# Altium PCB quads.PcbDoc (part 1 of 2)
Units mil, origin at the board's own origin, x right, y up, seen from the top; angles counter-clockwise.
Board outline 3936.87 x 3936.87 mil, 2 copper layers (Top Layer, Bottom Layer); 52 components, 53 nets, 184 pads, 27 vias.
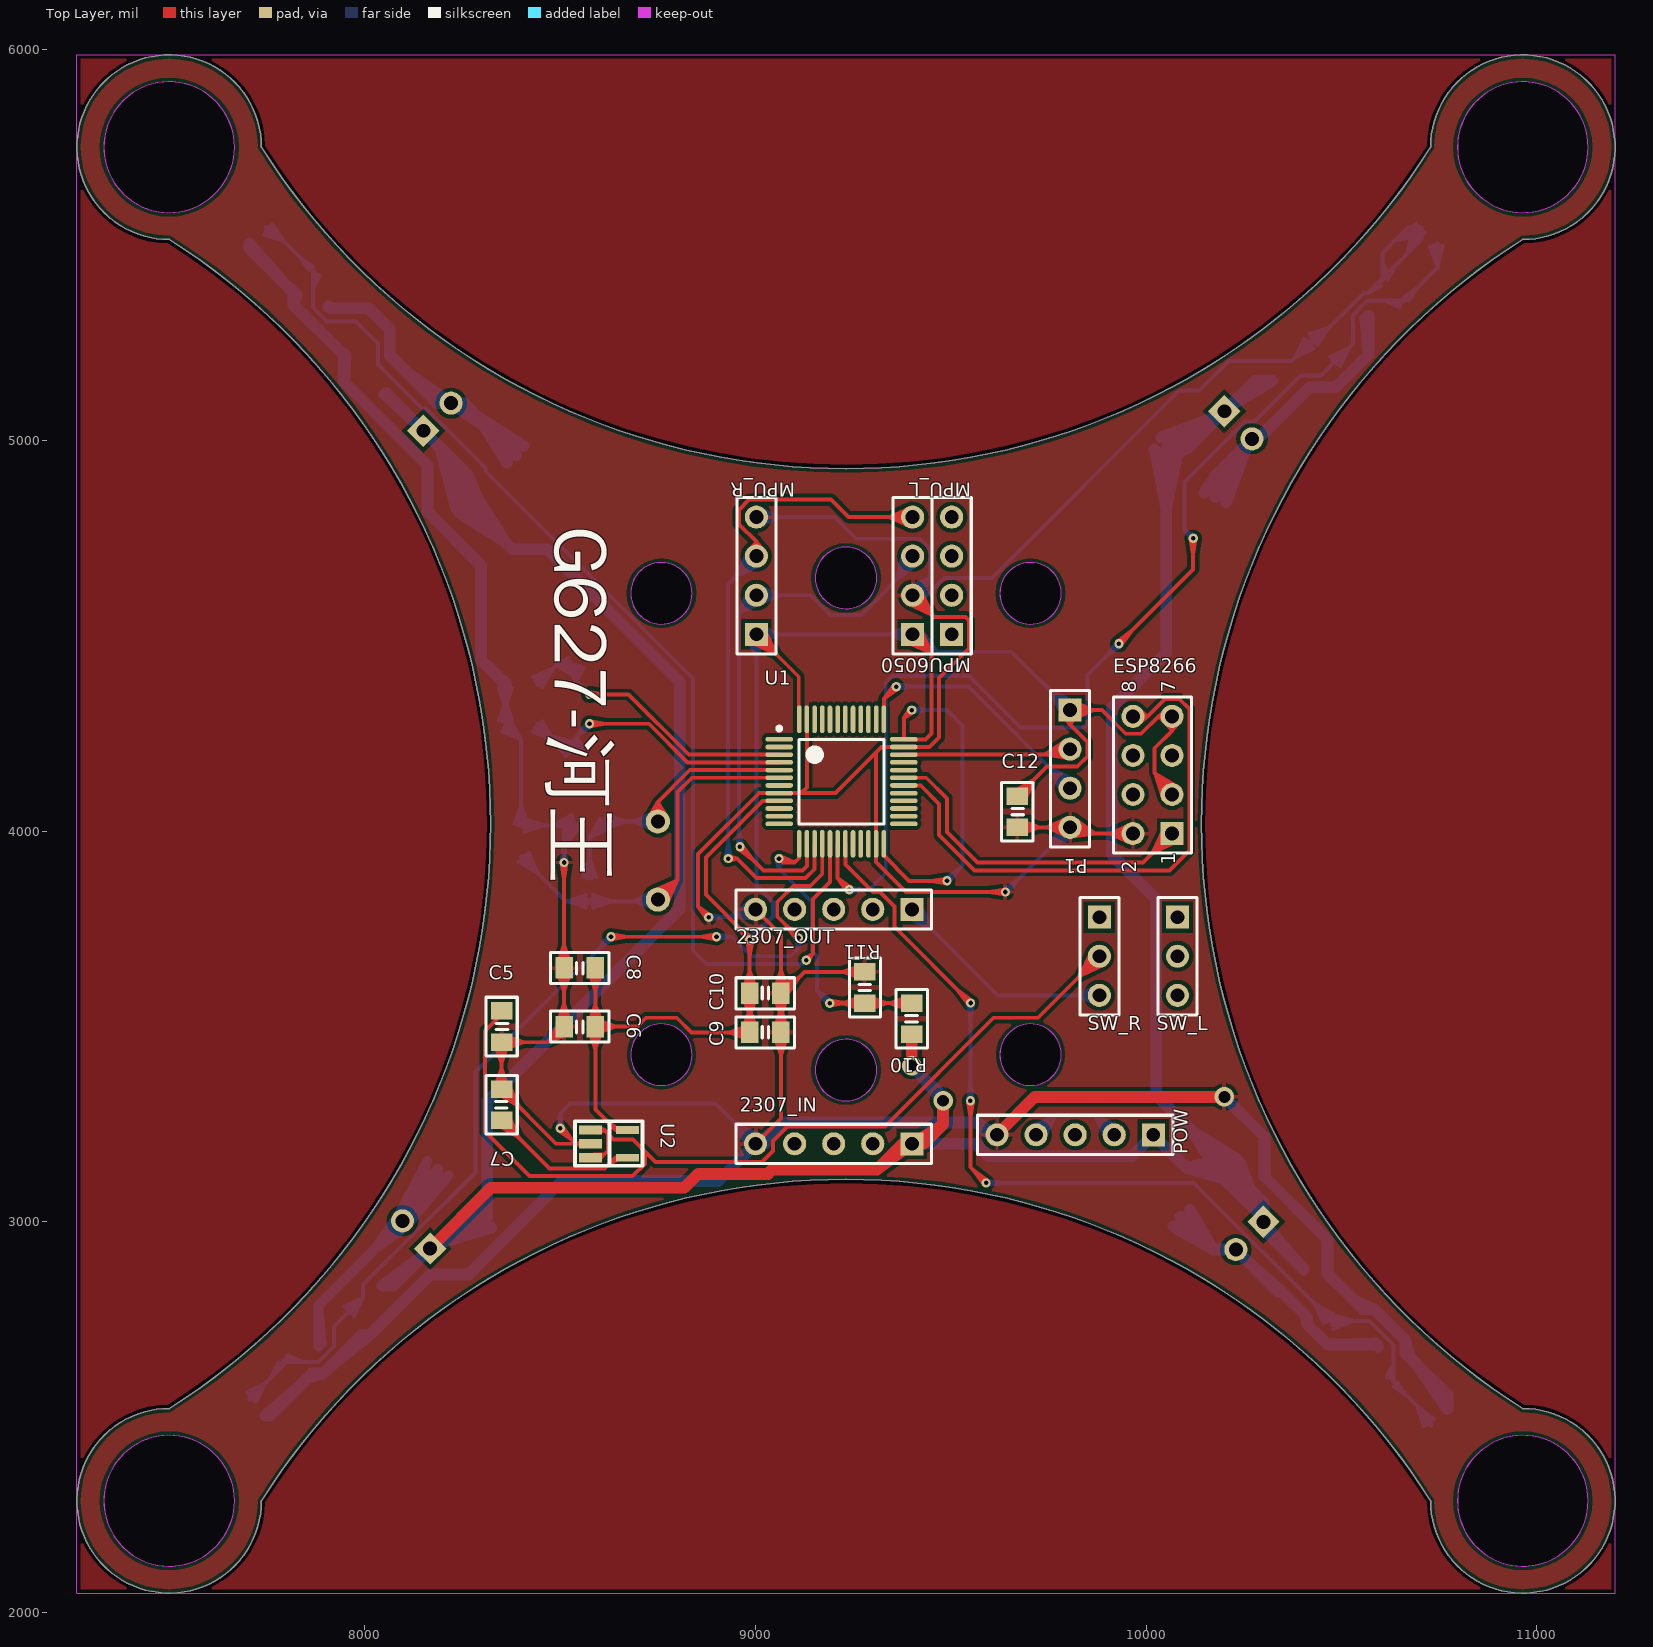
[diagram p0: Top Layer view]
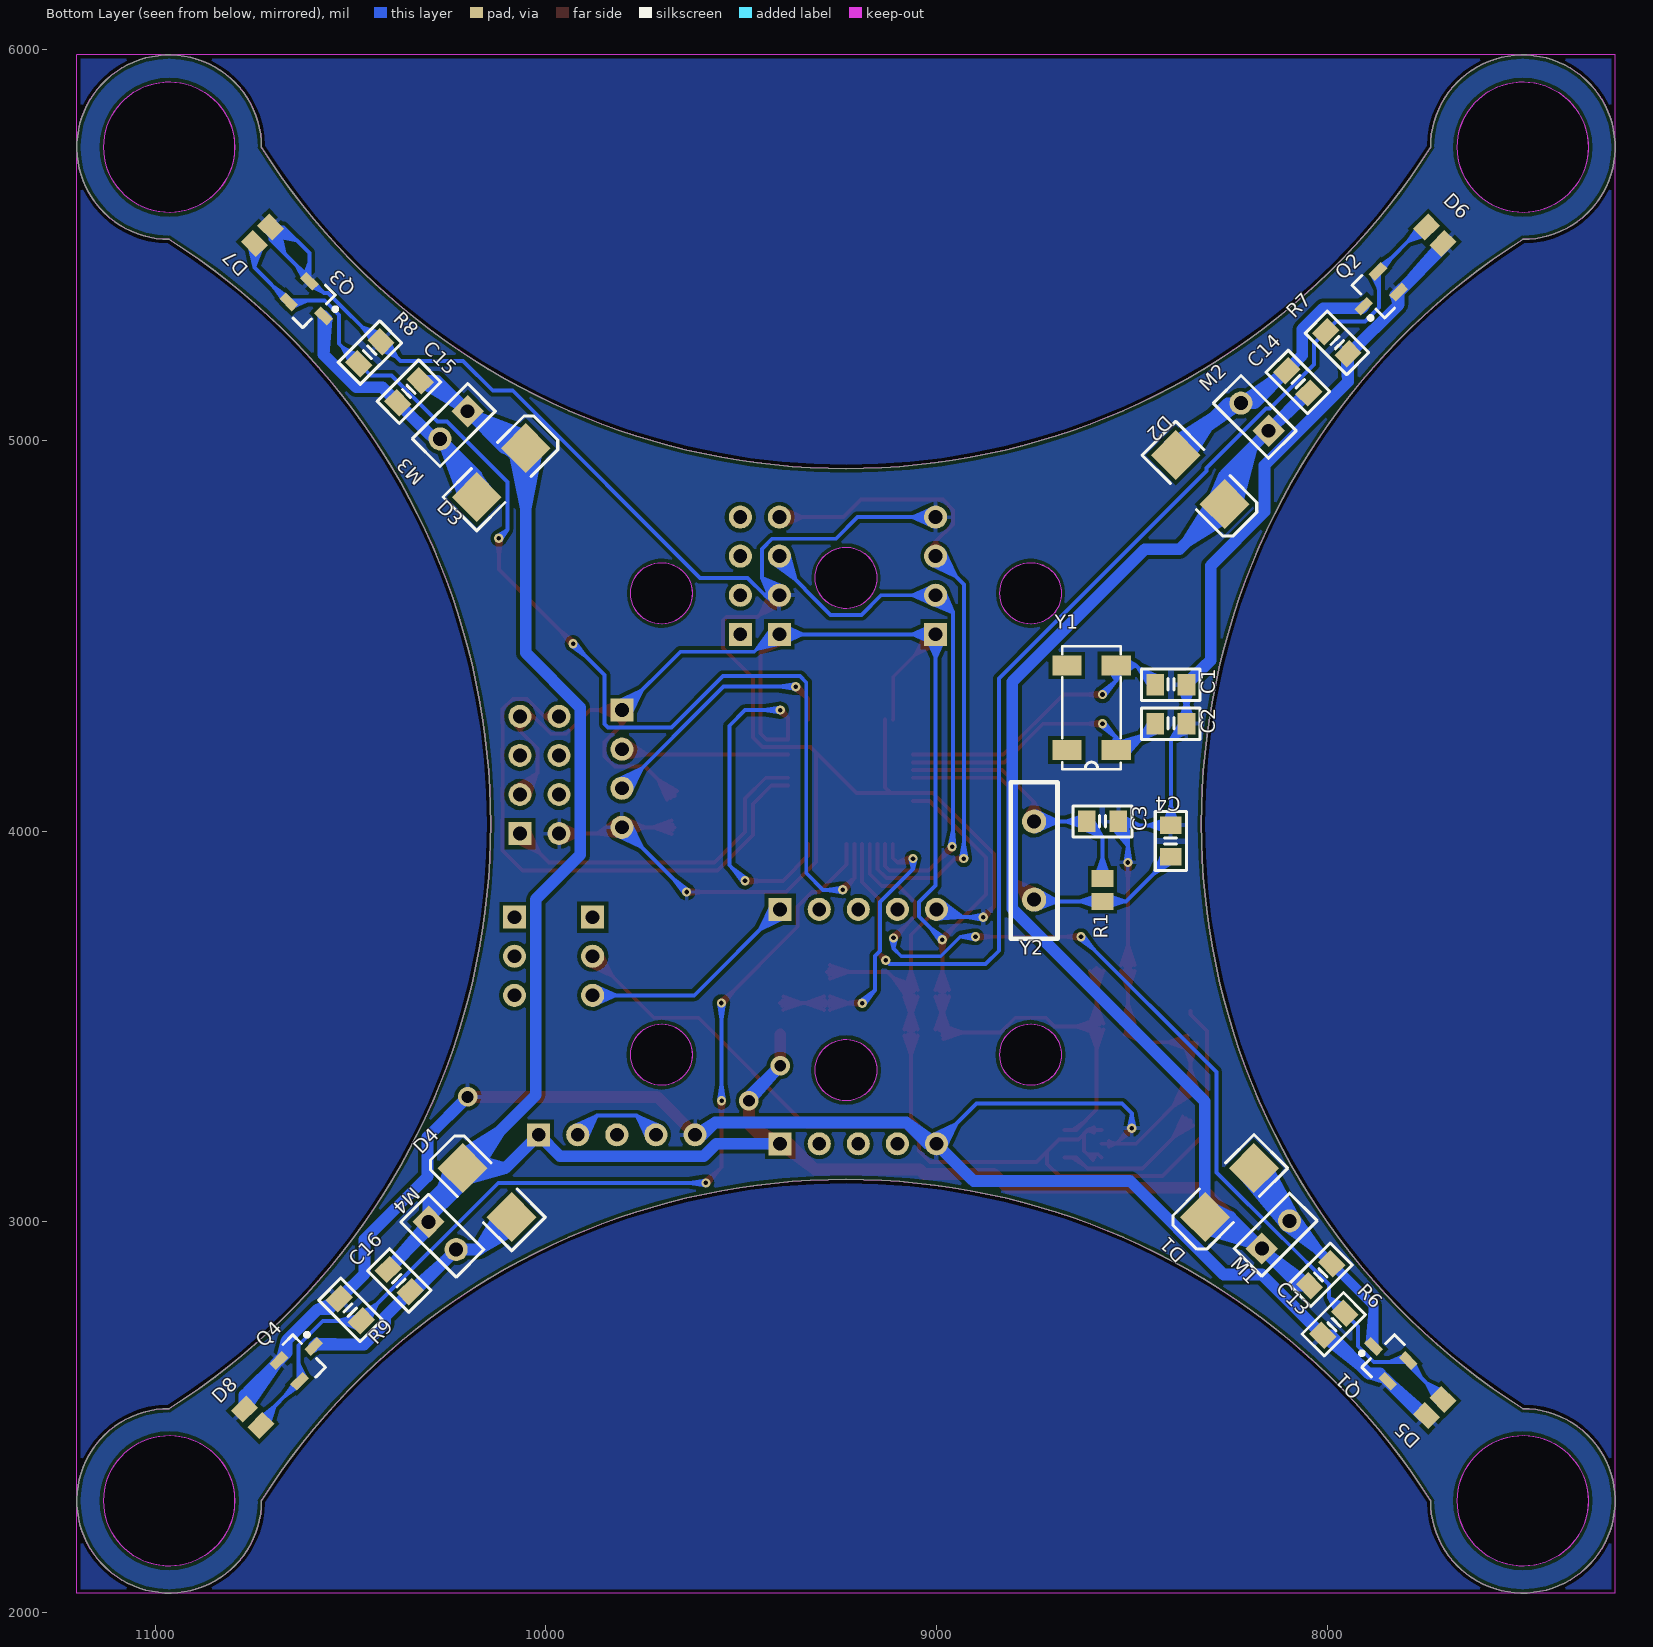
[diagram p1: Bottom Layer view, seen from below]

## Layer stack, top to bottom
Top Layer: signal copper 1.4
Dielectric: dielectric 12.6, FR-4, Dk 4.8
Bottom Layer: signal copper 1.4

## Board outline
10727.56,2286.22 ccw(c10963.78,2286.22) 10963.78,2522.44 cw(c11912.75,4018.5) 10963.78,5514.56 ccw(c10963.78,5750.78) 10727.56,5750.78 cw(c9231.5,6699.75) 7735.44,5750.78 ccw(c7499.22,5750.78) 7499.22,5514.56 cw(c6550.25,4018.5) 7499.22,2522.44 ccw(c7499.22,2286.22) 7735.44,2286.22 cw(c9231.5,1337.25)
cut-out: 10963.78,2118.9 ccw(c10963.78,2286.22) 11131.1,2286.22 ccw(c10963.78,2286.22) 10963.78,2453.54 ccw(c10963.78,2286.22) 10796.46,2286.22 ccw(c10963.78,2286.22)
cut-out: 10963.78,5583.46 ccw(c10963.78,5750.78) 11131.1,5750.78 ccw(c10963.78,5750.78) 10963.78,5918.1 ccw(c10963.78,5750.78) 10796.46,5750.78 ccw(c10963.78,5750.78)
cut-out: 9231.5,3309.84 ccw(c9231.5,3388.58) 9310.24,3388.58 ccw(c9231.5,3388.58) 9231.5,3467.32 ccw(c9231.5,3388.58) 9152.76,3388.58 ccw(c9231.5,3388.58)
cut-out: 9703.94,3349.21 ccw(c9703.94,3427.95) 9782.68,3427.95 ccw(c9703.94,3427.95) 9703.94,3506.69 ccw(c9703.94,3427.95) 9625.2,3427.95 ccw(c9703.94,3427.95)
cut-out: 9703.94,4530.31 ccw(c9703.94,4609.05) 9782.68,4609.05 ccw(c9703.94,4609.05) 9703.94,4687.79 ccw(c9703.94,4609.05) 9625.2,4609.05 ccw(c9703.94,4609.05)
cut-out: 9231.5,4569.68 ccw(c9231.5,4648.42) 9310.24,4648.42 ccw(c9231.5,4648.42) 9231.5,4727.16 ccw(c9231.5,4648.42) 9152.76,4648.42 ccw(c9231.5,4648.42)
cut-out: 7499.22,5583.46 ccw(c7499.22,5750.78) 7666.54,5750.78 ccw(c7499.22,5750.78) 7499.22,5918.1 ccw(c7499.22,5750.78) 7331.9,5750.78 ccw(c7499.22,5750.78)
cut-out: 8759.06,4530.31 ccw(c8759.06,4609.05) 8837.8,4609.05 ccw(c8759.06,4609.05) 8759.06,4687.79 ccw(c8759.06,4609.05) 8680.32,4609.05 ccw(c8759.06,4609.05)
cut-out: 8759.06,3349.21 ccw(c8759.06,3427.95) 8837.8,3427.95 ccw(c8759.06,3427.95) 8759.06,3506.69 ccw(c8759.06,3427.95) 8680.32,3427.95 ccw(c8759.06,3427.95)
cut-out: 7499.22,2118.9 ccw(c7499.22,2286.22) 7666.54,2286.22 ccw(c7499.22,2286.22) 7499.22,2453.54 ccw(c7499.22,2286.22) 7331.9,2286.22 ccw(c7499.22,2286.22)

## Design rules (kind name [scope] priority, off if disabled: settings)
Clearance [All] p1: gap=10
PolygonConnect [All] p1: connectstyle=Relief reliefconductorwidth=10 reliefentries=4 polygonreliefangle="90 Angle" airgapwidth=10
RoutingVias [All] p1: holewidth=11.81 width=23.62 viastyle="Through Hole" minholewidth=11.81 minwidth=23.62 maxholewidth=28 maxwidth=50
SolderMaskExpansion [All] p1: expansion=4
Width [All] p1: maxlimit=50 minlimit=10 preferedwidth=10 minimp=50.000000 maximp=50.000000 favimp=50.000000
28 further rules are at their usual default settings.

## Components (designator, comment, footprint, x,y, rotation, side; value= is the part's Value field where it differs from the comment)
2307_IN "2307_in" HDR1X5 9400,3200 r180 top
2307_OUT "2307_out" HDR1X5 9400,3800 r180 top
C1 "20pF,0805" C0805tan 8400,4375 r0 bottom
C2 "20pF,0805" C0805tan 8400,4275 r0 bottom
C3 "20pF,0805" C0805tan 8575,4025 r0 bottom
C4 "20pF,0805" C0805tan 8400,3975 r270 bottom
C5 "105,0805" C0805tan 8350,3500 r90 top
C6 "106,0805" C0805tan 8550,3500 r0 top
C7 "223,0805" C0805tan 8350,3300 r270 top
C8 "104,0805" C0805tan 8550,3650 r0 top
C9 "104,0805" C0805tan 9025,3485 r180 top
C10 "104,0805" C0805tan 9025,3585 r180 top
C12 "104,0805" C0805tan 9670,4050 r90 top
C13 "104,0805" C0805tan 8017,2865 r135 bottom
C14 "104,0805" C0805tan 8075,5150 r45 bottom
C15 "104,0805" C0805tan 10350,5125 r315 bottom
C16 "104,0805" C0805tan 10375,2850 r225 bottom
D1 "1N5824" SMB 8250,3075 r315 bottom
D2 "1N5824" SMB 8325,4900 r225 bottom
D3 "1N5824" SMB 10114,4918 r135 bottom
D4 "1N5824" SMB 10150,3075 r45 bottom
D5 "LED" C0805 7725,2525 r315 bottom
D6 "LED" C0805 7725,5525 r225 bottom
D7 "LED" C0805 10725,5525 r135 bottom
D8 "LED" C0805 10750,2500 r45 bottom
ESP8266 "ESP8266" HDR2X4 10066,3994 r90 top
M1 "motor" HDR1X2 8167,2932 r135 bottom
M2 "motor" HDR1X2 8150,5025 r45 bottom
M3 "motor" HDR1X2 10200,5075 r315 bottom
M4 "motor" HDR1X2 10300,3000 r225 bottom
MPU6050 "MPU_R" HDR1X4 9402,4504 r90 top
MPU_L "MPU_L" HDR1X4 9502,4504 r90 top
MPU_R "MPU_R" HDR1X4 9002,4504 r90 top
P1 "SWD" HDR1X4 9805,4310 r270 top
POW "Header 5" HDR1X5 10018,3223 r180 top
Q1 "AO3400" SOT23_N 7850,2650 r45 bottom
Q2 "AO3400" SOT23_N 7875,5375 r315 bottom
Q3 "AO3400" SOT23_N 10600,5350 r225 bottom
Q4 "AO3400" SOT23_N 10625,2650 r135 bottom
R1 "Res2" C0805 8575,3850 r90 bottom
R6 "100K,0805" C0805tan 7983,2738 r135 bottom
R7 "100K,0805" C0805tan 7975,5250 r45 bottom
R8 "100K,0805" C0805tan 10450,5225 r315 bottom
R9 "100K,0805" C0805tan 10500,2775 r225 bottom
R10 "56K,0805" C0805tan 9400,3520 r270 top
R11 "39K,0805" C0805tan 9280,3600 r270 top
SW_L "Header 3" HDR1X3 10080,3780 r270 top
SW_R "Header 3" HDR1X3 9880,3780 r270 top
U1 "STM32F103C8T6" 48P 9220,4127 r0 top
U2 "RT9193" SOT-23-5 8625,3200 r270 top
Y1 "32.768K" MC-306 8603,4316 r90 bottom
Y2 "8MHz" XTAL1 8750,3825 r90 bottom

## Footprints (in the part's own frame and the unit in brackets; to place one, negate y for a bottom-side part, rotate by r counter-clockwise, add the part's x,y. Pads: shape width x height; smd on the part's side, far side on the other; paste and mask are expansions set on the pad)
48P [mm]
  oval 1.8x0.3 smd: 1(-4.05,2.75) 2(-4.05,2.25) 3(-4.05,1.75) 4(-4.05,1.25) 5(-4.05,0.75) 6(-4.05,0.25) 7(-4.05,-0.25) 8(-4.05,-0.75) 9(-4.05,-1.25) 10(-4.05,-1.75) 11(-4.05,-2.25) 12(-4.05,-2.75) 25(4.05,-2.75) 26(4.05,-2.25) 27(4.05,-1.75) 28(4.05,-1.25) 29(4.05,-0.75) 30(4.05,-0.25) 31(4.05,0.25) 32(4.05,0.75) 33(4.05,1.25) 34(4.05,1.75) 35(4.05,2.25) 36(4.05,2.75)
  oval 0.3x1.8 smd: 13(-2.75,-4.05) 14(-2.25,-4.05) 15(-1.75,-4.05) 16(-1.25,-4.05) 17(-0.75,-4.05) 18(-0.25,-4.05) 19(0.25,-4.05) 20(0.75,-4.05) 21(1.25,-4.05) 22(1.75,-4.05) 23(2.25,-4.05) 24(2.75,-4.05) 37(2.75,4.05) 38(2.25,4.05) 39(1.75,4.05) 40(1.25,4.05) 41(0.75,4.05) 42(0.25,4.05) 43(-0.25,4.05) 44(-0.75,4.05) 45(-1.25,4.05) 46(-1.75,4.05) 47(-2.25,4.05) 48(-2.75,4.05)
  silkscreen extent -4.17,-2.75 2.75,3.57, body extent -3.5,-3.5 3.5,3.5, height 1.6
C0805 [mm] "Chip Capacitor, Body 2.0x1.3mm, IPC High Density"
  rect 1.1x1.4 smd: 1(-0.75,0) 2(0.75,0)
  body extent -1.1,-0.72 1.1,0.72, height 1.4
C0805tan [mil]
  rect 45x55 smd: 1(-40,0) 2(40,0)
  silkscreen extent -75,-40 75,40
HDR1X2 [mm] "Connector; Header; 2 Position"
  rect 1.5x1.5 hole 0.9: 1(0,0)
  round 1.5 hole 0.9: 2(2.54,0)
  silkscreen extent -1.27,-1.27 3.81,1.27
HDR1X3 [mm] "Connector; Header; 3 Position"
  rect 1.5x1.5 hole 0.9: 1(0,0)
  round 1.5 hole 0.9: 2(2.54,0) 3(5.08,0)
  silkscreen extent -1.27,-1.27 6.35,1.27
HDR1X4 [mm]
  rect 1.5x1.5 hole 0.9: 1(0,0)
  round 1.5 hole 0.9: 2(2.54,0) 3(5.08,0) 4(7.62,0)
  silkscreen extent -1.27,-1.27 8.89,1.27
HDR1X5 [mm] "Connector; Header; 5 Position"
  rect 1.5x1.5 hole 0.9: 1(0,0)
  round 1.5 hole 0.9: 2(2.54,0) 3(5.08,0) 4(7.62,0) 5(10.16,0)
  silkscreen extent -1.27,-1.27 11.43,1.27
HDR2X4 [mm] "Connector; Header; 4x2 Position"
  rect 1.5x1.5 hole 0.9: 1(0,0)
  round 1.5 hole 0.9: 2(0,2.54) 3(2.54,0) 4(2.54,2.54) 5(5.08,0) 6(5.08,2.54) 7(7.62,0) 8(7.62,2.54)
  silkscreen extent -1.27,-1.27 8.89,3.81
MC-306 [mm]
  rect 1.3x1.9 smd: 1(-2.75,-1.6) 2(2.75,-1.6) 3(2.75,1.6) 4(-2.75,1.6)
  silkscreen extent -4,-1.9 4,1.9
SMB [mm] "DO-214-AA/SMB; 2 C-Bend Leads; Body 5.3 x 3.6 mm, inc. leads (LxW)"
  rect 2.3x2.3 smd: 1(-2.25,0) 2(2.25,0)
  silkscreen extent -3.8,-1.55 4.1,1.55
SOT23_N [mm] "SOT23, 3-Leads, Body 2.9x1.3mm, Pitch 0.95mm, Lead Span 2.3mm - Reverse Pinning, IPC Medium Density"
  rect 1.15x0.6 smd: 1(1.125,0) 2(-1.125,-0.95) 3(-1.125,0.95)
  silkscreen extent -0.2,-1.5 1.47,1.5, body extent -0.7,-1.5 0.7,1.5, height 1.1
SOT-23-5 [mm]
  rect 0.6x1.5 smd: 1(-0.9,-1.2) 2(0,-1.2)
  rect 0.63x1.5 smd: 3(0.9,-1.2)
  rect 0.5x1.5 smd: 4(0.9,1.2) 5(-0.9,1.2)
  silkscreen extent -1.47,-2.21 1.43,2.18
XTAL1 [mil]
  round 62 hole 35.43: 1(0,0) 2(200,0)
  silkscreen extent -100,-60 300,60

## Part data
C1 C2 C3 C4 C5 C6 C7 C8 C9 C10 C12 C13 C14 C15 C16: library part Cap, "Capacitor"
D1 D2 D3 D4 D5 D6 D7 D8: library part Diode, "Default Diode"
P1: library part "Header 4", "Header, 4-Pin"
POW: "Header, 5-Pin"
Q1 Q2 Q3 Q4: library part MESFET-N, "N-Channel MESFET"
R1: "Resistor"
R6 R7 R8 R9 R10 R11: library part Res2, "Resistor"
SW_L SW_R: "Header, 3-Pin"
U2: library part RT9193X_5P
Y1 Y2: library part XTAL, "Crystal Oscillator"

## Via types
v1: diameter 23.62, hole 11.81, Top Layer to Bottom Layer, 24 vias
v2: diameter 50, hole 30, Top Layer to Bottom Layer, 3 vias

## Nets (pads, with @x,y where several pads share a name; then routed paths per layer and width w, separated by ;. In a path a pad name is that pad's centre, name@x,y a point inside that pad or via, vN(x,y) a via of type N, cw(c..) or ccw(c..) an arc to the next point about the centre after c; other vN are vias at no path point)
5V: C5.2 SW_R.2 U2.1 U2.3 | length 3057.3
  Top Layer w10: C5.2@8350,3540 8350,3531.21 8307.5,3488.71 8307.5,3231.29 8421.62,3117.16 8685.43,3117.16 8716.77,3148.51 8716.77,3180.62 ; U2.3@8577.76,3164.57 8586.38,3173.19 8613.5,3173.19 ; U2.1@8577.76,3235.43 8611.66,3235.43 ; U2.3@8593.03,3171.73 8613.5,3173.19 ; U2.3@8594.88,3164.57 8613.5,3173.19 ; U2.1@8596.75,3228.74 8613.66,3235.43 ; U2.1@8596.75,3242.12 8613.66,3235.43 ; U2.3@8599.15,3158.52 8613.5,3173.19 ; SW_R.2@9859.95,3694.12 9829.26,3629.26 ; SW_R.2@9868.74,3689.18 9829.26,3629.26 ; SW_R.2@9880,3680 9722.51,3522.5 9609.39,3522.5 9331.41,3244.53 9081.56,3244.53 9044.53,3207.5 9044.53,3181.56 9016.16,3153.19 8744.2,3153.19 8716.77,3180.62 ; SW_R.2@9889.18,3668.74 9829.26,3629.26 ; SW_R.2@9894.12,3659.95 9829.26,3629.26 ; U2.1@8595.47,3235.43 8611.66,3235.43 ; U2.1@8595.47,3235.43 8613.66,3235.43 ; U2.1@8595.47,3235.43 8611.66,3235.43 ; U2.1@8595.47,3235.43 8611.66,3235.43 ; U2.1@8596.91,3228.78 8611.66,3235.43 ; U2.1@8596.91,3228.78 8611.66,3235.43 ; U2.1@8596.91,3228.78 8611.66,3235.43 ; U2.1@8596.91,3242.09 8611.66,3235.43 ; U2.1@8596.91,3242.09 8611.66,3235.43 ; U2.1@8596.91,3242.09 8611.66,3235.43 ; 8611.66,3235.43 8622.28,3224.81 ; 8611.66,3235.43 8613.66,3235.43 ; 8613.5,3173.19 8622.28,3181.98 8622.28,3224.81 ; 8613.66,3235.43 8622.28,3226.81 8622.28,3224.81 ; 8622.28,3224.81 8636.5,3210.59 8686.8,3210.59 8716.77,3180.62
BOOT0: U1.44
BOOT1: U1.20
ESP_RX: ESP8266.1 U1.31 | length 1215.8
  Top Layer w10: U1.31@9379.45,4136.84 9436.84,4136.84 9490,4083.68 9490,3998.28 9568.28,3920 9992,3920 ESP8266.1@10066,3994 10015.26,3943.26 ; ESP8266.1@10045.95,4008.12 10015.26,3943.26 ; ESP8266.1@10054.74,4003.18 10015.26,3943.26 ; ESP8266.1@10075.18,3982.74 10015.26,3943.26 ; ESP8266.1@10080.12,3973.95 10015.26,3943.26
ESP_TX: ESP8266.8 U1.30 | length 1573.9
  Top Layer w10: U1.30@9379.45,4117.16 9422.84,4117.16 9470,4070 9470,3990 9560,3900 10060,3900 10110.53,3950.53 10110.53,4029.74 10110,4030.27 10110,4075.03 10110.53,4075.56 10110.53,4112.44 10110,4112.97 10110,4175.03 10110.53,4175.56 10110.53,4212.44 10110,4212.97 10110,4275.03 10110.53,4275.56 10110.53,4312.44 10084.44,4338.53 10047.56,4338.53 10003.03,4294 ; ESP8266.8@9966,4294 10003.03,4294 ; ESP8266.8@9968.85,4279.75 10003.03,4294 ; ESP8266.8@9968.85,4308.25 10003.03,4294 ; ESP8266.8@9974.12,4270.86 10003.03,4294 ; ESP8266.8@9974.12,4317.14 10003.03,4294
GND: 2307_IN.5 2307_OUT.5 C1.1 C2.1 C3.1 C4.1 C5.1 C6.1 C7.1 C8.1 C9.1 C10.1 C12.1 D5.2 D6.2 D7.2 D8.2 ESP8266.2 MPU6050.2 MPU_R.4 P1.4 POW.5 Q1.3 Q2.3 Q3.3 Q4.3 R6.1 R7.1 R8.1 R9.1 R11.1 U1.8 U1.23 U1.35 U1.47 U2.2 | length 26989.2
  Top Layer w10: C7.1@8332.74,3342.92 8350,3392.5 ; C5.1@8332.74,3457.08 8350,3407.5 ; C7.1@8342.52,3340.54 8350,3392.5 ; C5.1@8342.52,3459.46 8350,3407.5 ; C7.1@8343.79,3326.57 8393.71,3296.29 ; C7.1@8349.72,3334.68 8393.71,3296.29 ; C7.1@8355,3340 8393.71,3296.29 ; C5.1@8355,3460 8407.5,3460 ; C5.1@8355.54,3452.52 8407.5,3460 ; C5.1@8355.54,3467.48 8407.5,3460 ; C7.1@8357.48,3340.54 8350,3392.5 ; C5.1@8357.48,3459.46 8350,3407.5 ; C5.1@8357.92,3442.74 8407.5,3460 ; C5.1@8357.92,3477.26 8407.5,3460 ; C7.1@8360.92,3344.6 8393.71,3296.29 ; C7.1@8367.26,3342.92 8350,3392.5 ; C5.1@8367.26,3457.08 8350,3407.5 ; C7.1@8369.69,3349.51 8393.71,3296.29 ; C6.1@8492.74,3507.92 8510,3557.5 ; C8.1@8492.74,3642.08 8510,3592.5 ; C8.1@8492.74,3657.92 8510,3707.5 ; v1@8495.55,3234.85 8533.02,3206.98 v1@8505.15,3244.45 ; C6.1@8496.47,3506.09 8470,3460 ; v1(8500,3240) 8540,3200 ; C6.1@8502.52,3505.54 8510,3557.5 ; C8.1@8502.52,3644.46 8510,3592.5 ; C8.1@8502.52,3655.54 8510,3707.5 ; v1@8503.21,3919.45 8510,3878.19 v1@8516.79,3919.45 ; C6.1@8504.68,3500.28 8470,3460 ; C6.1@8510,3495 8470,3460 ; C6.1@8510,3505 8510,3557.5 ; C8.1@8510,3645 8510,3592.5 ; C8.1@8510,3655 8510,3707.5 ; v1@8510,3925 v1(8510,3920) C8.1@8510,3650 C6.1@8510,3500 8470,3460 ; C6.1@8514.53,3489.02 8470,3460 ; C6.1@8517.48,3505.54 8510,3557.5 ; C8.1@8517.48,3644.46 8510,3592.5 ; C8.1@8517.48,3655.54 8510,3707.5 ; C6.1@8519.2,3480.11 8470,3460 ; C6.1@8527.26,3507.92 8510,3557.5 ; C8.1@8527.26,3642.08 8510,3592.5 ; C8.1@8527.26,3657.92 8510,3707.5 ; U2.2@8558.88,3193.29 8540,3200 ; U2.2@8558.88,3206.71 8540,3200 ; U2.2@8560.04,3200 8540,3200 ; U2.2@8577.76,3200 8540,3200 ; v1@8874.77,3775.64 8853.19,3806.81 ; v1@8884.36,3785.23 8853.19,3806.81 ; 2307_IN.5@9000,3200 9065,3265 C9.1@9065,3485 C10.1@9065,3585 9065,3735 2307_OUT.5@9000,3800 ; C9.1@9047.74,3477.08 9065,3427.5 ; C9.1@9047.74,3492.92 9065,3542.5 ; C10.1@9047.74,3577.08 9065,3527.5 ; C10.1@9047.74,3592.92 9065,3642.5 ; C10.1@9056.47,3605.28 9110.33,3625.33 ; C9.1@9057.52,3479.46 9065,3427.5 ; C9.1@9057.52,3490.54 9065,3542.5 ; C10.1@9057.52,3579.46 9065,3527.5 ; C10.1@9057.52,3590.54 9065,3642.5 ; C10.1@9060.79,3596.2 9110.33,3625.33 ; C9.1@9065,3480 9065,3427.5 ; C9.1@9065,3490 9065,3542.5 ; C10.1@9069.99,3584.4 9110.33,3625.33 ; C9.1@9072.48,3479.46 9065,3427.5 ; C9.1@9072.48,3490.54 9065,3542.5 ; C10.1@9072.48,3579.46 9065,3527.5 ; C10.1@9072.48,3590.54 9065,3642.5 ; C10.1@9077.73,3578 9110.33,3625.33 ; C9.1@9082.26,3477.08 9065,3427.5 ; C9.1@9082.26,3492.92 9065,3542.5 ; C10.1@9082.26,3577.08 9065,3527.5 ; C10.1@9082.26,3592.92 9065,3642.5 ; 9099.96,4097.47 9116.47,4097.47 ; U1.47@9131.42,4286.45 9131.42,4112.42 9116.47,4097.47 ; R11.1@9272.08,3622.74 9222.5,3640 ; R11.1@9272.08,3657.26 9222.5,3640 ; R11.1@9274.46,3632.52 9222.5,3640 ; R11.1@9274.46,3647.48 9222.5,3640 ; R11.1@9275,3640 9222.5,3640 ; R11.1@9280,3640 9125,3640 9065,3580 9065,3527.5 ; MPU6050.2@9387.88,4583.95 9452.74,4553.26 ; MPU6050.2@9392.82,4592.74 9452.74,4553.26 ; MPU6050.2@9402,4604 9457.47,4548.53 9537.74,4548.53 9546.53,4539.74 9546.53,4468.26 9470,4391.73 9470,4240 9445.58,4215.58 U1.35@9379.45,4215.58 9322.58,4215.58 9308.58,4201.58 ; MPU6050.2@9413.26,4613.18 9452.74,4553.26 ; MPU6050.2@9422.05,4618.12 9452.74,4553.26 ; v1@9638.97,3837.74 9597.72,3844.53 v1@9638.97,3851.32 ; v1(9639.53,3844.53) 9385.47,3844.53 9308.58,3921.42 U1.23@9308.58,3967.55 9308.58,4141.58 9308.58,4201.58 ; C12.1@9670,4010 P1.4@9805,4010 ; C12.1@9675,4010 9727.5,4010 ; C12.1@9675.54,4002.52 9727.5,4010 ; C12.1@9675.54,4017.48 9727.5,4010 ; C12.1@9677.92,3992.74 9727.5,4010 ; C12.1@9677.92,4027.26 9727.5,4010 ; P1.4@9799.95,3986 9745.47,4010 ; P1.4@9799.95,4034 9745.47,4010 ; P1.4@9803.07,3995.6 9869.81,3994 ; P1.4@9803.23,3995.58 9745.47,4010 ; P1.4@9803.23,4024.42 9745.47,4010 ; P1.4@9803.6,3985.51 9869.81,3994 ; P1.4@9810,4023.64 9869.81,3994 ; P1.4@9815.15,4032.33 9869.81,3994 ; ESP8266.2@9960.95,3970 9906.47,3994 ; ESP8266.2@9960.95,4018 9906.47,3994 ; ESP8266.2@9964.23,3979.58 9906.47,3994 ; ESP8266.2@9964.23,4008.42 9906.47,3994 ; ESP8266.2@9966,3994 9821,3994 P1.4@9805,4010 ; 8470,3460 C5.1@8350,3460 C7.1@8350,3340 8490,3200 8540,3200 ; 8853.19,3806.81 8853.19,3941.47 9009,4097.28 9009,4097.47 U1.8@9060.55,4097.47 9116.47,4097.47 ; 8853.19,3806.81 v1(8880,3780) 8853.19,3806.81 ; 9065,3642.5 9065,3590 9110.33,3625.33 ; 9116.47,4097.47 9204.47,4097.47 9308.58,4201.58 ; P1.4@9805,4010 9869.81,3994
  Top Layer w30: POW.5@9618,3223 9715,3320 v2(10200,3320) 10085,3320
  Bottom Layer w10: C2.1@8342.74,4282.92 8360,4332.5 ; C1.1@8342.74,4367.08 8360,4317.5 ; C2.1@8350.8,4255.11 8400,4235 ; C2.1@8352.52,4280.54 8360,4332.5 ; C1.1@8352.52,4369.46 8360,4317.5 ; C2.1@8355.47,4264.02 8400,4235 ; C2.1@8360,4270 8400,4235 ; C2.1@8360,4280 8360,4332.5 ; C1.1@8360,4370 8360,4317.5 ; C1.1@8360,4375 C2.1@8360,4275 8400,4235 ; C2.1@8365.32,4275.28 8400,4235 ; C2.1@8367.48,4280.54 8360,4332.5 ; C1.1@8367.48,4369.46 8360,4317.5 ; C2.1@8373.53,4281.09 8400,4235 ; C2.1@8377.26,4282.92 8360,4332.5 ; C1.1@8377.26,4367.08 8360,4317.5 ; C4.1@8382.74,4017.92 8400,4067.5 ; C4.1@8392.52,4015.54 8400,4067.5 ; C4.1@8405,4015 8457.5,4015 ; C4.1@8405.54,4007.52 8457.5,4015 ; C4.1@8405.54,4022.48 8457.5,4015 ; C4.1@8407.48,4015.54 8400,4067.5 ; C4.1@8407.92,3997.74 8457.5,4015 ; C4.1@8407.92,4032.26 8457.5,4015 ; C4.1@8417.26,4017.92 8400,4067.5 ; v1@8493.22,3240.61 8500,3278 ; v1(8500,3240) 8500,3278 ; v1@8503.21,3920.55 8510,3961.81 v1@8516.79,3920.55 ; v1@8506.78,3240.61 8500,3278 ; v1(8510,3920) 8510,4000 ; C3.1@8518.12,4024.63 8510,3961.88 ; C3.1@8527.95,4022.55 8510,3961.88 ; C3.1@8529.22,4041.52 8479.98,4015 ; C3.1@8533.17,4032.27 8479.98,4015 ; C3.1@8535.4,4007.5 8479.98,4015 ; C3.1@8535.84,4017.55 8479.98,4015 ; C3.1@8541.7,4016.63 8510,3961.88 ; C3.1@8549.96,4010.93 8510,3961.88 ; v1(8880,3780) 8980,3780 2307_OUT.5@9000,3800 8932.16,3780 ; v1@8880.55,3773.21 8921.81,3780 v1@8880.55,3786.79 ; 2307_IN.5@8979.95,3185.88 8949.26,3250.74 ; 2307_IN.5@8988.74,3190.82 8949.26,3250.74 ; 2307_OUT.5@8989.09,3821.97 8932.16,3780 ; 2307_OUT.5@8994.48,3813.44 8932.16,3780 ; 2307_IN.5@9000,3200 8897,3303 8813.5,3303 8646.5,3303 8525,3303 8500,3278 ; MPU_R.4@9002,4804 9202,4804 9257.47,4748.53 9420.44,4748.53 9446.53,4722.44 9446.53,4648.53 ; 2307_OUT.5@9002.66,3785.72 8932.16,3780 ; 2307_OUT.5@9002.75,3775.63 8932.16,3780 ; MPU_R.4@9003.77,4789.58 9061.53,4804 ; MPU_R.4@9003.77,4818.42 9061.53,4804 ; MPU_R.4@9007.05,4780 9061.53,4804 ; MPU_R.4@9007.05,4828 9061.53,4804 ; 2307_IN.5@9009.18,3211.26 8949.26,3250.74 ; 2307_IN.5@9014.12,3220.05 8949.26,3250.74 ; MPU6050.2@9388.37,4624.39 9446.53,4648.53 ; MPU6050.2@9392.98,4615.39 9446.53,4648.53 ; MPU6050.2@9404.85,4589.75 9439.03,4604 ; MPU6050.2@9404.85,4618.25 9439.03,4604 ; MPU6050.2@9410.12,4580.86 9439.03,4604 ; MPU6050.2@9410.12,4627.14 9439.03,4604 ; MPU6050.2@9413.39,4594.98 9446.53,4648.53 ; MPU6050.2@9422.39,4590.37 9446.53,4648.53 ; v1@9635.08,3849.68 9672.55,3877.55 v1@9644.68,3840.08 ; v1(9639.53,3844.53) P1.4@9805,4010 ; P1.4@9784.95,4024.12 9754.26,3959.26 ; P1.4@9793.74,4019.18 9754.26,3959.26 ; P1.4@9814.18,3998.74 9754.26,3959.26 ; P1.4@9819.12,3989.95 9754.26,3959.26 ; R8.1@10403.92,5259.89 10381.06,5212.63 ; R8.1@10412.51,5254.66 10381.06,5212.63 ; R8.1@10417.16,5272.34 10468.54,5289.26 ; R8.1@10418.18,5249.75 10381.06,5212.63 ; R8.1@10421.18,5263.12 10468.54,5289.26 ; R8.1@10423.09,5244.08 10381.06,5212.63 ; R8.1@10425.25,5256.82 10468.54,5289.26 ; R8.1@10428.32,5235.48 10381.06,5212.63 ; R8.1@10430.15,5251.14 10468.54,5289.26 ; R8.1@10437.87,5244.7 10468.54,5289.26 ; Q3.3@10592.63,5405.14 10567.96,5378.04 ; Q3.3@10597.22,5400.11 10567.96,5378.04 ; Q3.3@10600.8,5394.32 10567.96,5378.04 ; Q3.3@10604.87,5407.77 10604.87,5480 10670.75,5545.88 D7.2@10704.12,5545.88 10704.12,5514.2 10567.96,5378.04 ; Q3.3@10605.76,5414.69 10604.87,5454.47 ; Q3.3@10607.52,5420.04 10638.79,5448.86 ; Q3.3@10618.2,5411.66 10638.79,5448.86 ; Q3.3@10619.07,5417.3 10604.87,5454.47 ; D7.2@10684.26,5547.3 10668.62,5478.7 ; D7.2@10691.08,5555.8 10636.49,5511.62 ; D7.2@10693.85,5544.38 10668.62,5478.7 ; D7.2@10696.81,5547.57 10636.49,5511.62 ; D7.2@10702.51,5535.56 10636.49,5511.62 ; D7.2@10705.24,5525.92 10636.49,5511.62 ; D7.2@10705.76,5538.46 10668.62,5478.7 ; D7.2@10713.87,5532.58 10668.62,5478.7 ; 8400,4235 C4.1@8400,4015 C3.1@8525,4015 ; 8479.98,4015 C3.1@8535,4025 C3.1@8525,4015 ; 8510,3961.88 C3.1@8535,4020 ; 8510,4000 C3.1@8525,4015 ; 8510,4000 8541.78,4003.87 8510,4000 ; 8510,4000 8520.75,4030.16 8510,4000 ; 8510,4000 8538.97,4013.64 8510,4000 ; 8510,4000 8529.66,4025.27 8510,4000 ; 8510,4000 C3.1@8535,4020 ; 8510,4000 C3.1@8535,4020 ; 9439.03,4604 9483.56,4648.53 9605,4648.53 10084.39,5127.92 10135.53,5127.92 10211.25,5203.64 10286.21,5203.64 10372.07,5203.64 R8.1@10421.72,5253.28 10432.57,5253.28 10557.33,5378.04 10567.96,5378.04 ; 9439.03,4604 MPU6050.2@9402,4604 9446.53,4648.53 ; 10604.87,5454.47 10612.53,5415.42 10638.79,5448.86 ; 10636.49,5511.62 10699.94,5541.7 10668.62,5478.7
  Bottom Layer w30: D6.2@7704.12,5504.12 7704.12,5492.99 Q2.3@7817.23,5379.87 7817.23,5347.91 ; D6.2@7708.3,5499.94 7782.44,5414.67 ; 7737.59,5459.52 Q2.3@7809.58,5387.53 ; D5.2@7745.88,2504.12 7757.01,2504.12 Q1.3@7845.13,2592.23 7864.86,2611.96 7893.28,2611.96 ; D5.2@7750.06,2508.3 Q1.3@7835.26,2582.36 ; D5.2@7760.7,2517.55 7837.47,2584.58 D5.2@7765.48,2512.59 ; Q1.3@7852.78,2599.89 7893.28,2611.96 ; 7914.91,2633.6 R6.1@8007.75,2706.18 ; R7.1@7950.25,5218.18 7946.72,5150.71 ; R6.1@8014.82,2713.25 8094.37,2792.8 ; C1.1@8360,4375 8298.1,4436.9 ; C1.1@8360,4380 8298.1,4436.9 ; 8906.83,3106.83 2307_IN.5@9000,3200 ; v2(10200,3320) 10302.55,3217.45 10302.55,3116.27 10463.64,2955.19 10463.64,2867.93 ; R9.1@10524.75,2806.82 10463.64,2867.93 ; R9.1@10531.82,2799.75 10583.14,2776.72 ; Q4.3@10675.11,2652.78 10663.04,2696.81 ; 10700.87,2627.03 D8.2@10766.7,2525.06 ; 10752.39,2547.23 10690.42,2637.47 10762.41,2565.48 ; D8.2@10770.88,2520.88 10770.88,2557.01 ; 7817.23,5347.91 7943.43,5221.72 R7.1@7946.72,5221.72 7946.72,5150.71 ; 7817.23,5347.91 7824.89,5372.22 7817.23,5347.91 ; 7893.28,2611.96 7991.03,2709.72 R6.1@8011.28,2709.72 8166.81,2865.24 8264.9,2865.24 8504.39,3104.73 8904.73,3104.73 2307_IN.5@9000,3200 ; 7946.72,5150.71 8160.45,4936.97 8160.45,4817.37 8298.1,4679.72 8298.1,4436.9 ; 2307_IN.5@9000,3200 9022.89,3200 9077.41,3254.53 ; 2307_IN.5@9000,3200 9077.41,3254.53 ; 9077.41,3254.53 9565.93,3254.53 ; 9565.93,3254.53 9597.45,3223 POW.5@9618,3223 9565.93,3254.53 ; 10463.64,2867.93 R9.1@10528.28,2803.28 10554.85,2776.72 10583.14,2776.72 ; 10583.14,2776.72 10663.04,2696.81 ; 10663.04,2696.81 10663.04,2664.86 Q4.3@10682.77,2645.13 10770.88,2557.01 ; D8.2@10766.7,2525.06 10770.88,2557.01 ; D8.2@10766.7,2525.06 10770.88,2557.01
NetC7_2: C7.2 U2.4 | length 742.7
  Top Layer w10: C7.2@8343.79,3246.57 8393.71,3216.29 ; C7.2@8349.72,3254.68 8393.71,3216.29 ; C7.2@8350,3260 8472.84,3137.16 8613.5,3137.16 8640.9,3164.57 ; C7.2@8355,3260 8393.71,3216.29 ; C7.2@8360.92,3264.6 8393.71,3216.29 ; C7.2@8369.69,3269.51 8393.71,3216.29 ; 8616.91,3140.58 U2.4@8652.56,3164.57 ; U2.4@8672.24,3164.57 8640.9,3164.57 ; 8640.9,3164.57 U2.4@8652.56,3164.57 ; 8640.9,3164.57 U2.4@8652.56,3164.57
NetC13_2: C13.2 D1.1 M1.2 Q1.1 | length 2736.4
  Bottom Layer w25: Q1.1@7881.32,2681.32 7881.32,2785.89 C13.2@7988.72,2893.28 8096.29,3000.86 M1.2@8096.29,3002.71 ; 7881.32,2773.02 Q1.1@7888.98,2688.98 ; 7916.24,2820.81 C13.2@7985.18,2889.75 ; C13.2@7992.25,2896.82 8061.19,2965.76 ; M1.2@8083.17,3013.57 8023.29,2927.86 ; M1.2@8085.27,3015.69 8170.2,3076.62 M1.2@8109.27,2991.69 ; M1.2@8107.47,2989.87 8023.29,2927.86 ; D1.1@8156.9,3149.74 M1.2@8114.84,2999.45 ; D1.1@8157.64,3151.44 M1.2@8115.66,3022.08 ; D1.1@8160.17,3155.93 M1.2@8085.87,3016.12 ; D1.1@8210.21,3114.13 M1.2@8085.87,3016.12 ; D1.1@8212.93,3117.12 M1.2@8115.66,3022.08 ; D1.1@8214.63,3119.44 M1.2@8114.84,2999.45 ; 8023.29,2927.86 M1.2@8096.29,3002.71 ; M1.2@8085.87,3016.12 D1.1@8187.36,3137.64 ; M1.2@8096.29,3002.71 8187.36,3093.78 D1.1@8187.36,3137.64 ; M1.2@8114.84,2999.45 D1.1@8187.36,3137.64 ; M1.2@8115.66,3022.08 D1.1@8187.36,3137.64
NetC14_2: C14.2 D2.1 M2.2 Q2.1 | length 1634.6
  Bottom Layer w30: Q2.1@7906.32,5343.68 7911.36,5338.64 8010.1,5338.64 8063.64,5285.1 8063.64,5217.93 ; C14.2@8099.75,5181.82 8063.64,5217.93 ; C14.2@8108,5173.56 M2.2@8220.71,5095.71 ; M2.2@8199.64,5110.27 8106.82,5174.75 8185.86,5095.71 ; 8333.3,5016.97 M2.2@8220.71,5095.71 ; D2.1@8363.97,4943.76 8291.98,5058.29 ; D2.1@8406.51,4986.31 8291.98,5058.29 ; 8063.64,5217.93 C14.2@8103.28,5178.28 8185.86,5095.71 ; 8185.86,5095.71 M2.2@8220.71,5095.71 ; M2.2@8220.71,5095.71 8254.56,5095.71 D2.1@8387.64,4962.64 8291.98,5058.29
NetC15_2: C15.2 D3.1 M3.2 Q3.1 | length 2178.1
  Bottom Layer w30: D3.1@10148.54,4866.65 10186.19,4919.77 ; D3.1@10152.06,4873.04 M3.2@10250.7,4984.28 ; D3.1@10152.31,4873.39 M3.2@10260.99,4994.57 ; D3.1@10203.88,4842.15 M3.2@10260.99,4994.57 ; D3.1@10204.29,4843.03 M3.2@10250.7,4984.28 ; D3.1@10206.8,4858.01 10186.19,4919.77 ; M3.2@10295.2,5013.63 C15.2@10374.75,5093.18 ; C15.2@10381.82,5100.25 10417.93,5136.36 ; Q3.1@10561.02,5311.02 10568.68,5219.94 ; Q3.1@10568.68,5318.68 10568.68,5219.94 ; D3.1@10176.64,4855.36 10176.64,4910.22 M3.2@10270.71,5004.29 ; D3.1@10176.64,4855.36 M3.2@10260.99,4994.57 ; D3.1@10176.64,4855.36 M3.2@10250.7,4984.28 ; D3.1@10176.64,4855.36 10186.19,4919.77 ; 10186.19,4919.77 M3.2@10270.71,5004.29 ; M3.2@10270.71,5004.29 10285.86,5004.29 C15.2@10378.28,5096.72 10417.93,5136.36 ; 10417.93,5136.36 10485.1,5136.36 10568.68,5219.94
NetC16_2: C16.2 D4.1 M4.2 Q4.1 | length 1247.8
  Bottom Layer w30: D4.1@10068.89,2988.38 10170.44,2929.29 ; D4.1@10087.36,3012.36 10170.44,2929.29 ; D4.1@10111.35,3030.84 10170.44,2929.29 ; 10258.14,2900.44 C16.2@10343.18,2825.25 ; C16.2@10350.25,2818.18 10411.36,2757.07 ; 10485.55,2686.36 Q4.1@10586.02,2688.98 ; Q4.1@10593.68,2681.32 10588.64,2686.36 10464.9,2686.36 10411.36,2739.9 10411.36,2757.07 ; 10170.44,2929.29 M4.2@10229.29,2929.29 ; 10170.44,2929.29 M4.2@10229.29,2929.29 ; M4.2@10229.29,2929.29 10336.86,2821.72 C16.2@10346.72,2821.72 10411.36,2757.07
NetPOW_2: POW.2 POW.4 | length 795
  Bottom Layer w10: POW.4@9704,3243.14 9767,3272 ; POW.4@9708.86,3234.29 9767,3272 ; POW.4@9718,3223 9767,3272 ; POW.4@9729.29,3213.86 9767,3272 ; POW.4@9738.14,3209 9767,3272 ; POW.2@9897.86,3209 9869,3272 ; POW.2@9906.71,3213.86 9869,3272 ; POW.2@9918,3223 9869,3272 ; POW.2@9927.14,3234.29 9869,3272 ; POW.2@9932,3243.14 9869,3272 ; 9767,3272 9869,3272
NetR2_1: 
NetR3_1: 
OSCIN: C3.2 R1.2 U1.5 Y2.2 | length 2039.7
  Top Layer w10: Y2.2@8724.89,4031.76 8750,4075 ; Y2.2@8734.21,4027.56 8750,4075 ; Y2.2@8744.01,4025.36 8750,4075 ; Y2.2@8750,4025 8750,4075 ; Y2.2@8755.99,4025.36 8750,4075 ; Y2.2@8765.79,4027.56 8750,4075 ; Y2.2@8775.11,4031.76 8750,4075 ; U1.5@9060.55,4156.53 8831.53,4156.53 8750,4075
  Bottom Layer w10: R1.2@8558.56,3882.21 8575,3931.18 ; R1.2@8568.36,3879.96 8575,3931.18 ; R1.2@8575,3879.53 8575,3985 ; R1.2@8581.64,3879.96 8575,3931.18 ; R1.2@8591.44,3882.21 8575,3931.18 ; C3.2@8601.46,4031.09 8575,3985 ; C3.2@8609.67,4025.28 8575,3985 ; C3.2@8615,4020 8575,3985 ; C3.2@8615.53,4017.52 8667.5,4025 ; C3.2@8615.53,4032.48 8667.5,4025 ; C3.2@8617.91,4007.74 8667.5,4025 ; C3.2@8617.91,4042.26 8667.5,4025 ; C3.2@8619.53,4014.02 8575,3985 ; C3.2@8624.2,4005.11 8575,3985 ; Y2.2@8744.46,3999.6 8689,4025 ; Y2.2@8744.46,4050.4 8689,4025 ; Y2.2@8747.9,4009.14 8689,4025 ; Y2.2@8747.9,4040.86 8689,4025 ; Y2.2@8749.7,4019.01 8689,4025 ; Y2.2@8749.7,4030.99 8689,4025 ; Y2.2@8750,4025 C3.2@8615,4025 8575,3985